# Altium PCB Controller.PcbDoc (part 1 of 2)
Units mm, origin at the board's own origin, x right, y up, seen from the top; angles counter-clockwise.
Board outline 100 x 95 mm, 2 copper layers (Top Layer, Bottom Layer); 164 components, 143 nets, 702 pads, 925 vias.
Unrouted connection lines stored in the file: 248.
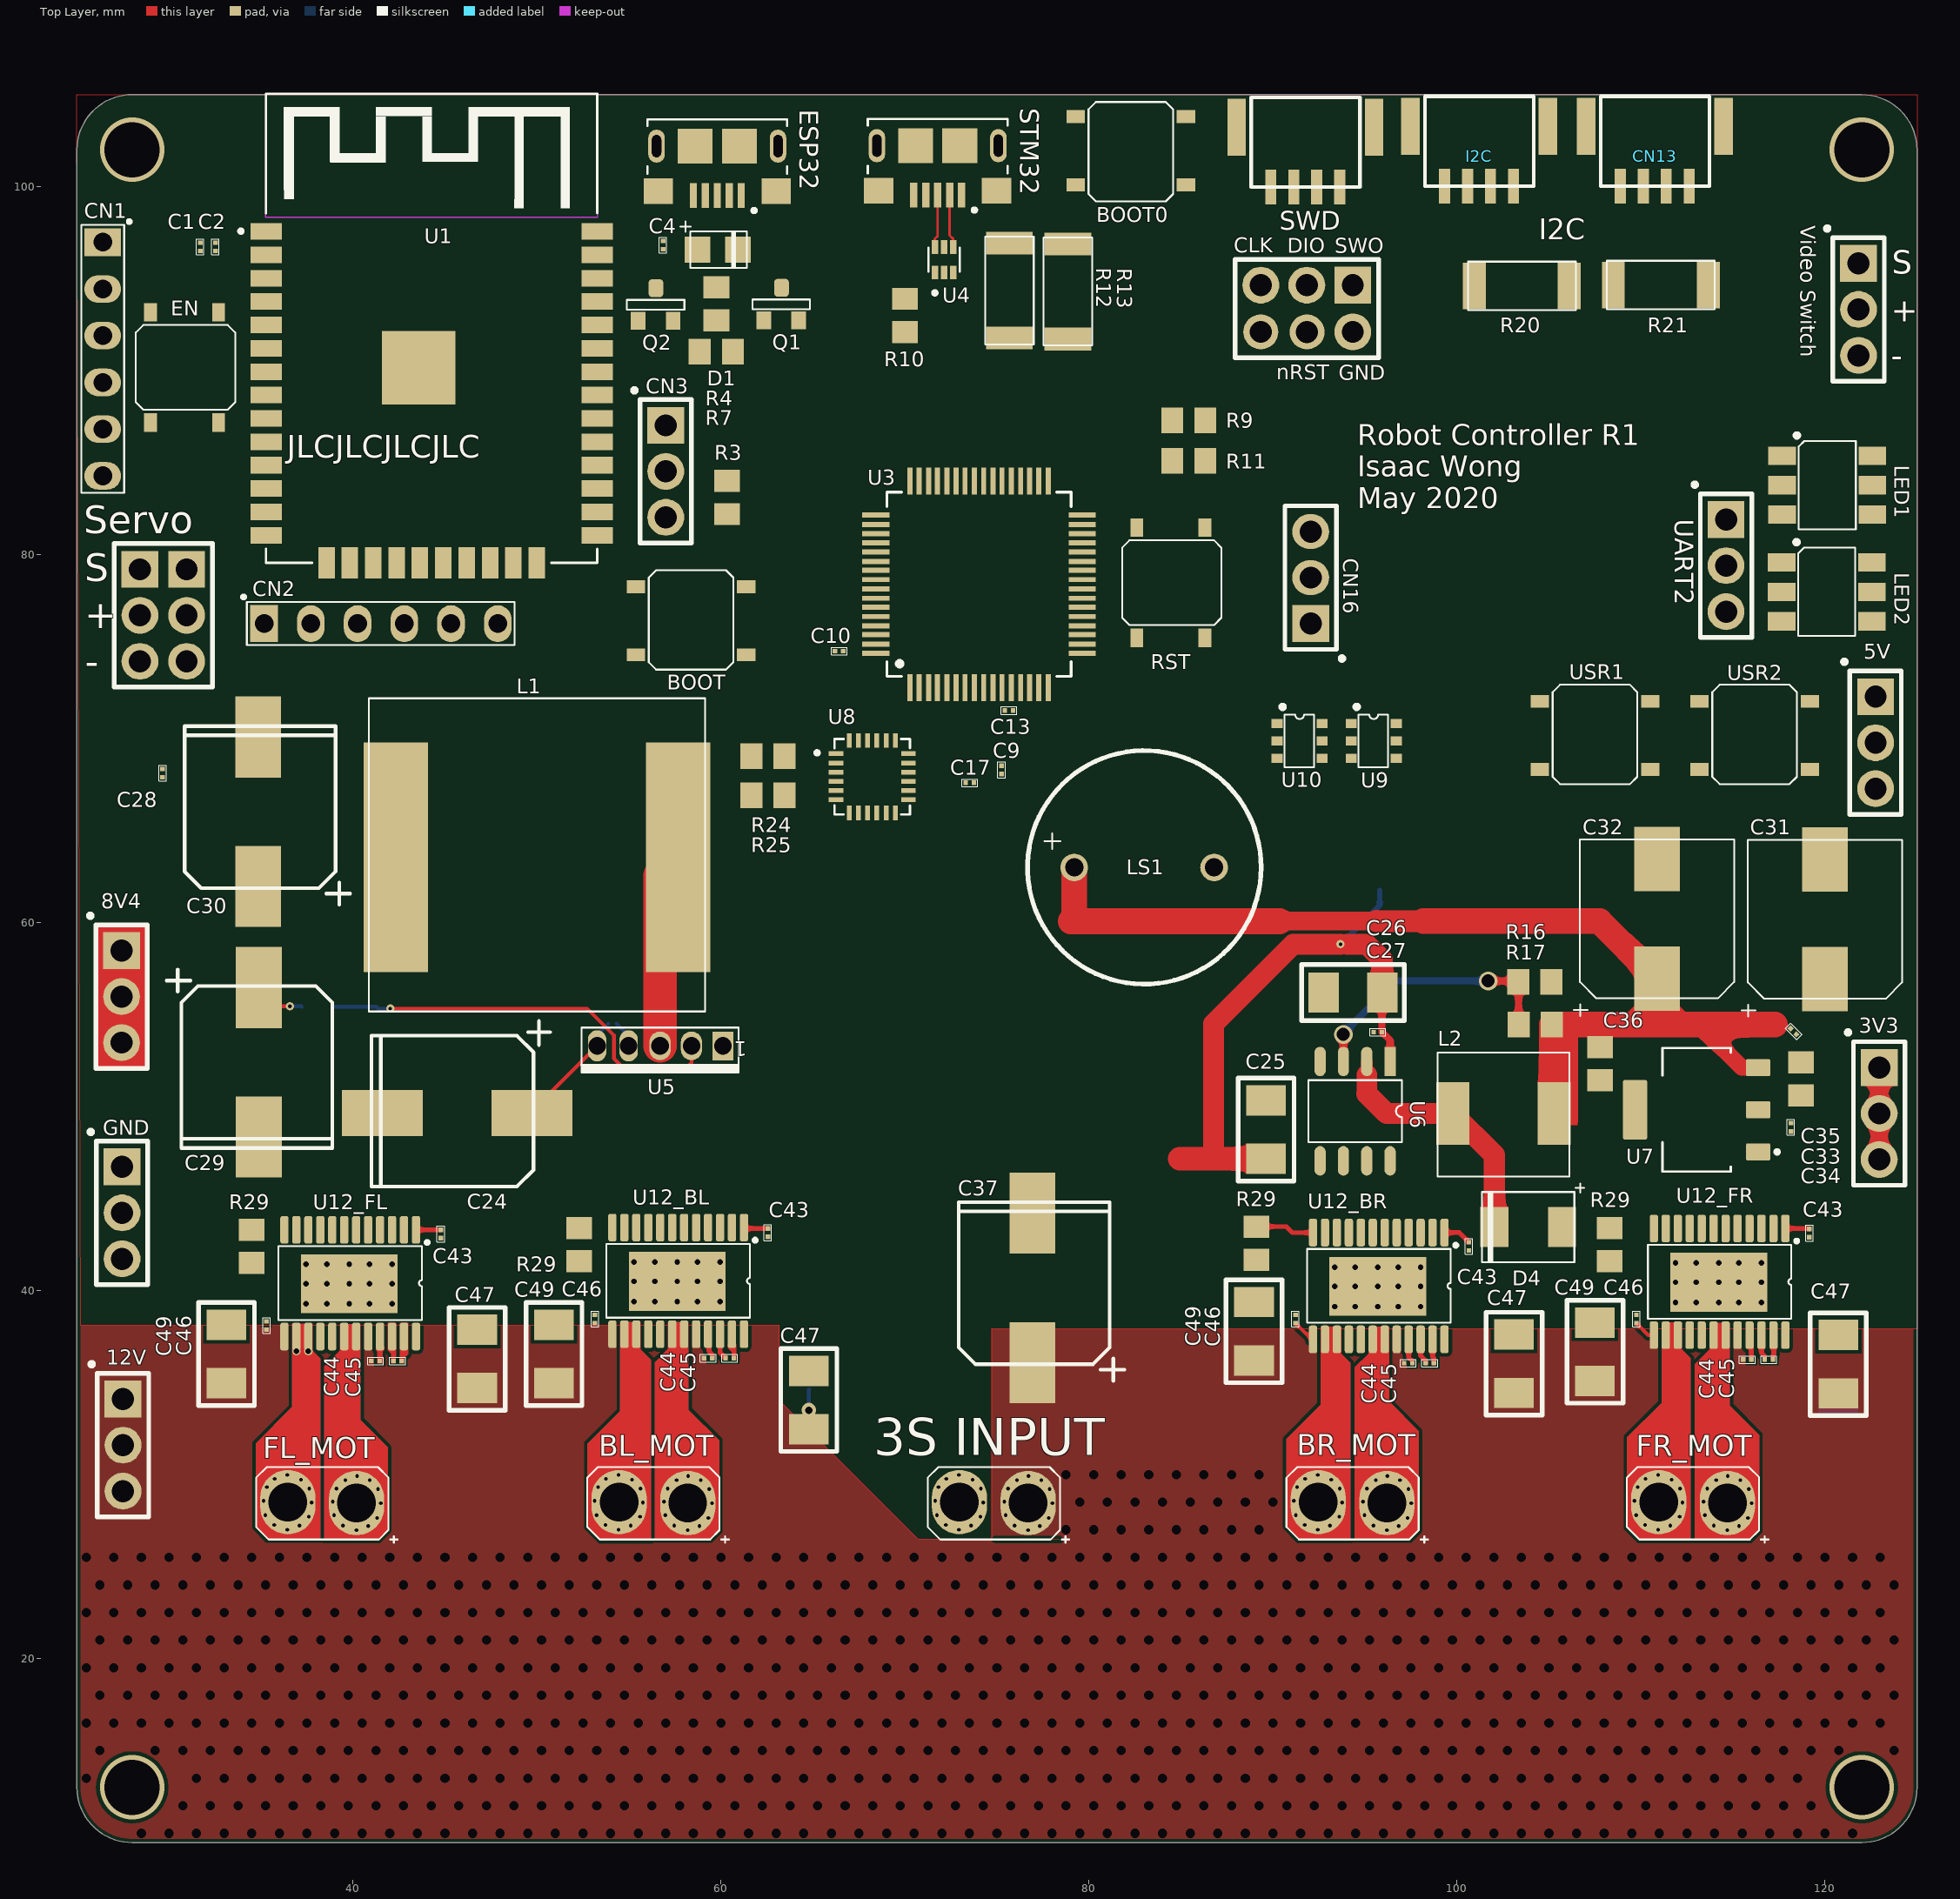
[diagram p0: Top Layer view]
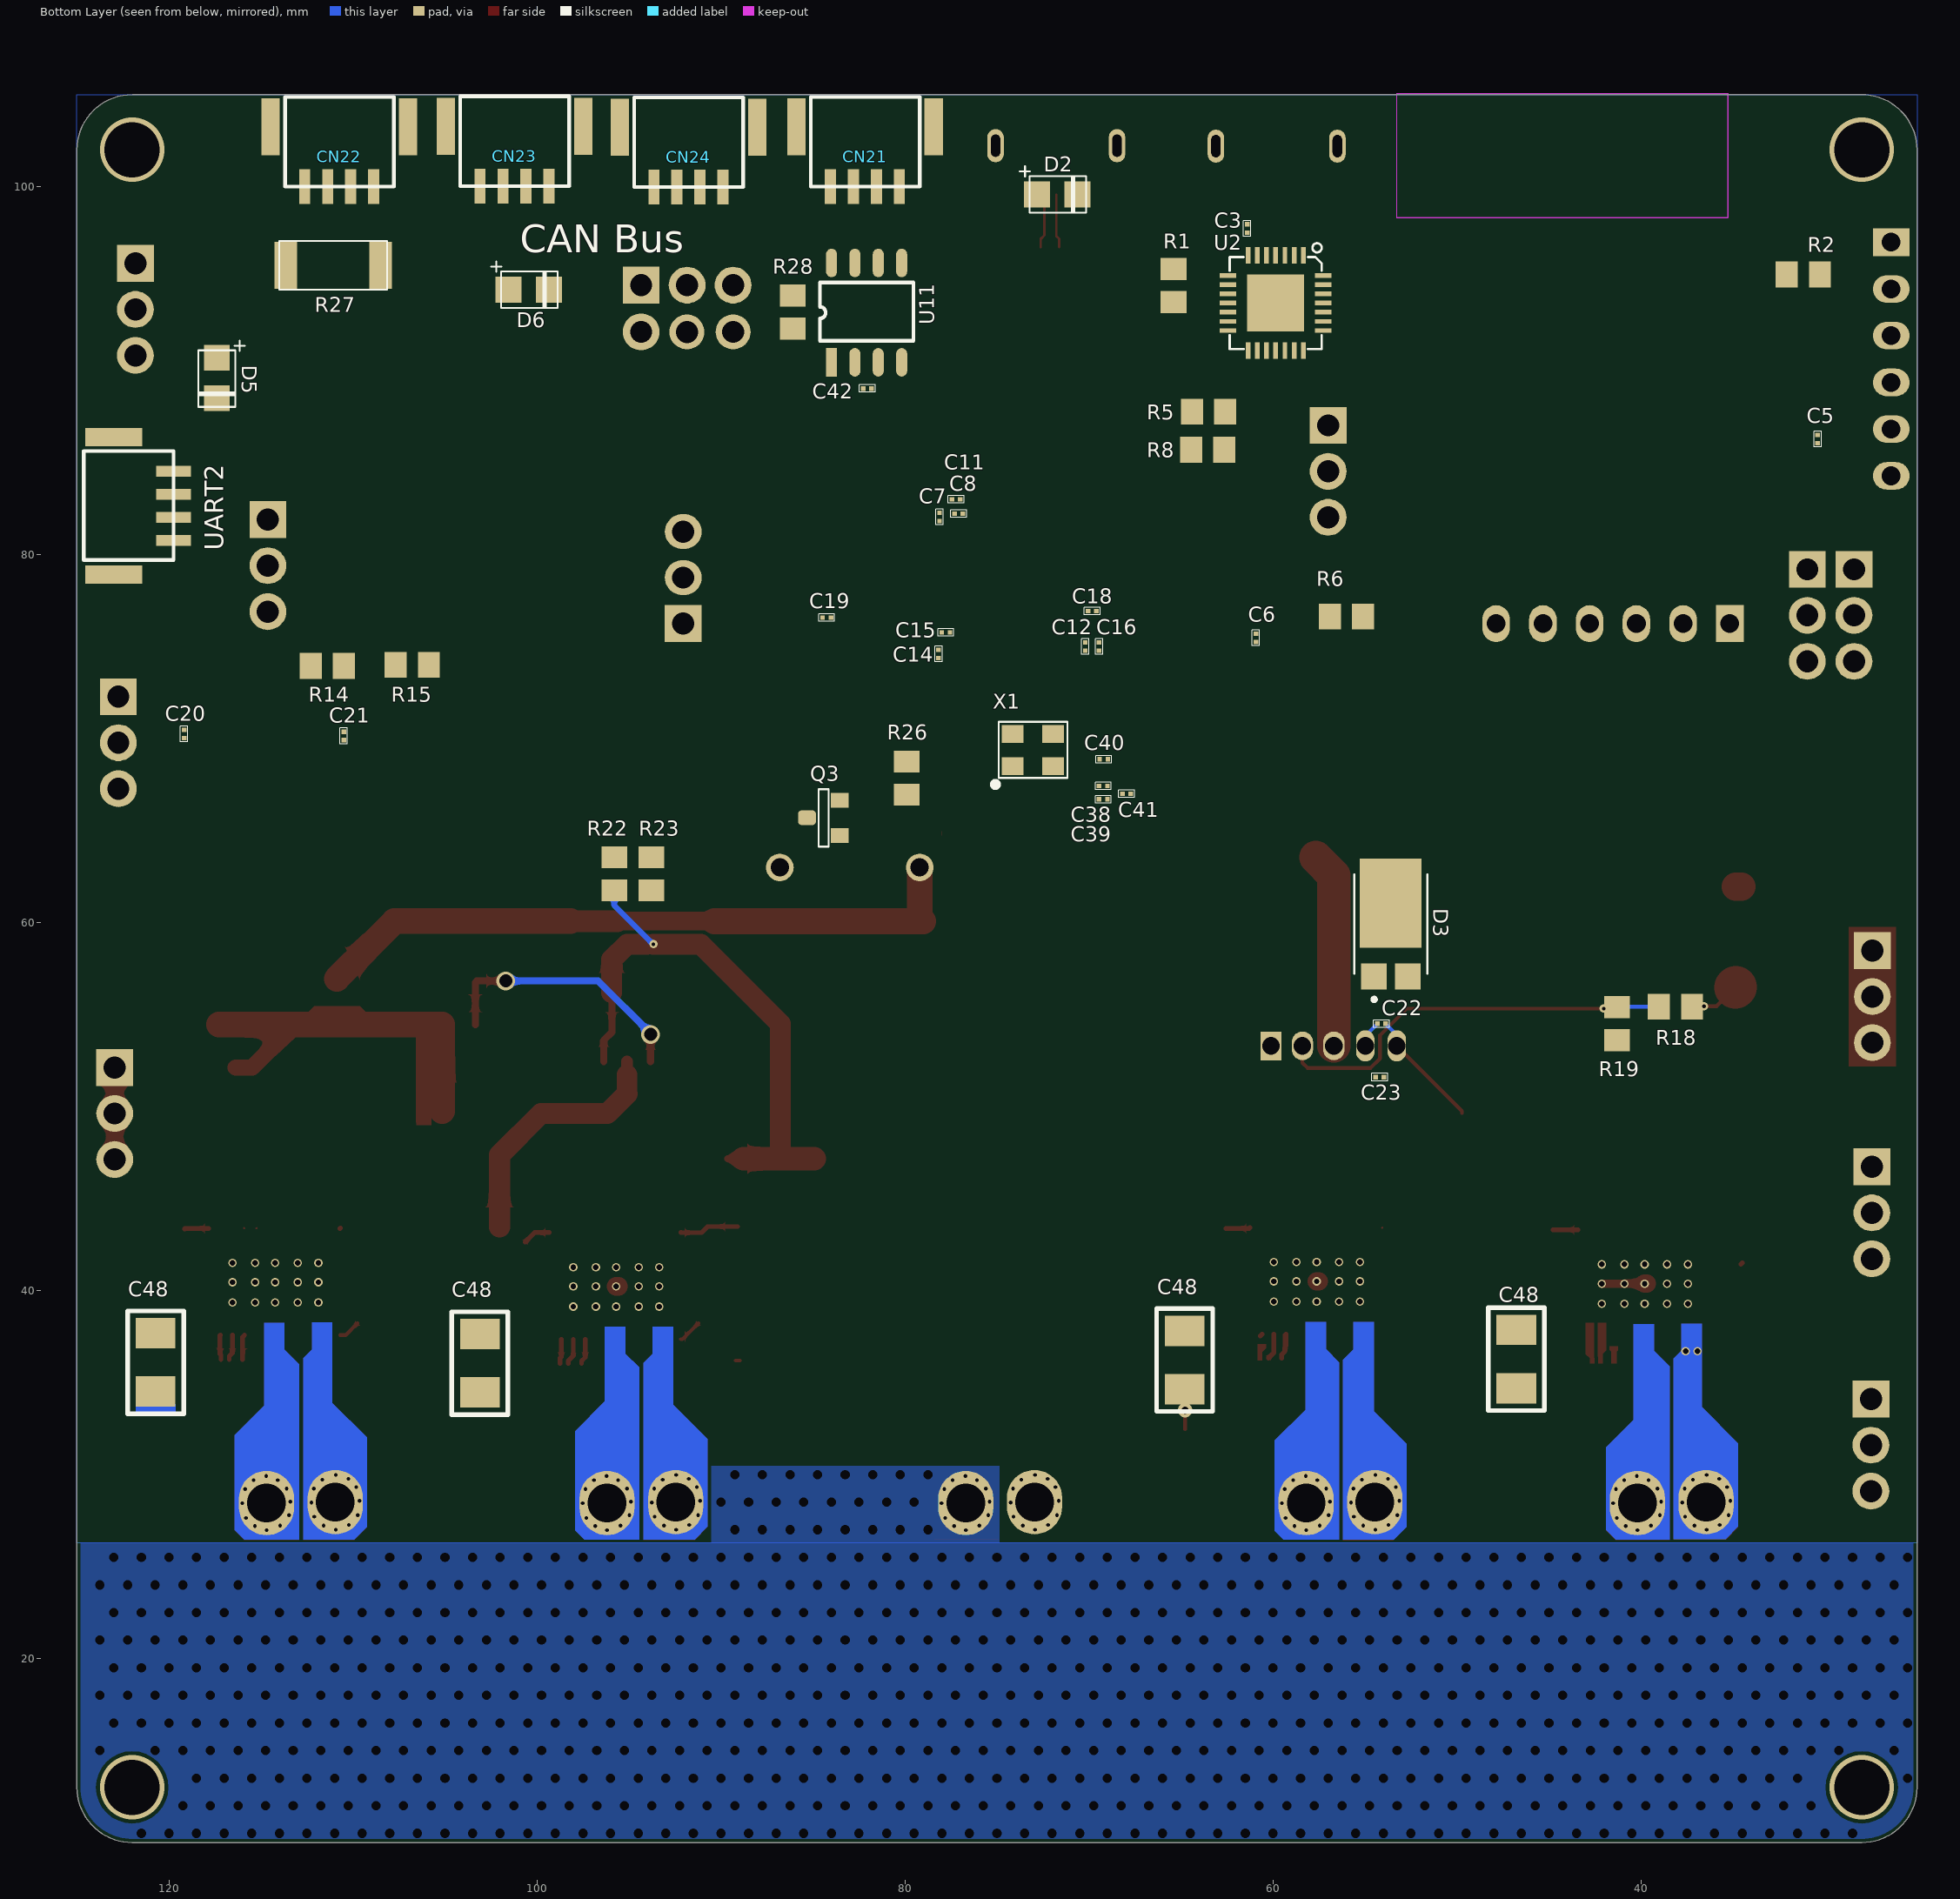
[diagram p1: Bottom Layer view, seen from below]

## Layer stack, top to bottom
Top Solder: solder mask 0.0102, Solder Resist, Dk 3.5
Top Layer: signal copper 0.0356
Dielectric 1: dielectric 0.32, FR-4, Dk 4.8
Bottom Layer: signal copper 0.0356
Bottom Solder: solder mask 0.0102, Solder Resist, Dk 3.5

## Board outline
25,13 ccw(c28,13) 28,10 122,10 ccw(c122,13) 125,13 125,102 ccw(c122,102) 122,105 28,105 ccw(c28,102) 25,102

## Design rules (kind name [scope] priority, off if disabled: settings)
BoardOutlineClearance [All] p1: gap=0.2 ignorepadtopadclearanceinfootprint=FALSE except(0.4: Arc-SplitBarrior Arc-SplitContinuation Track-SplitBarrior Track-SplitContinuation SMDPad-SplitBarrior SMDPad-SplitContinuation THPad-SplitBarrior THPad-SplitContinuation Via-SplitBarrior Via-SplitContinuation Fill-SplitBarrior Fill-SplitContinuation Poly-SplitBarrior Poly-SplitContinuation Region-SplitBarrior Region-SplitContinuation Text-SplitBarrior Text-SplitContinuation)
Clearance "Clearance Bottom Layer" [OnLayer('Bottom Layer')] p1: gap=0.2 ignorepadtopadclearanceinfootprint=TRUE except(0.1: Arc-Arc Arc-Track Arc-SMDPad Track-Track Track-SMDPad SMDPad-SMDPad; 0.127: Arc-Via Track-Via SMDPad-Via THPad-Via Via-Via; 0.254: Arc-Text Track-Text SMDPad-Text THPad-Text Via-Text Text-Text)
Clearance "Clearance Top Layer" [OnLayer('Top Layer')] p2: gap=0.2 ignorepadtopadclearanceinfootprint=TRUE except(0.1: Arc-Arc Arc-Track Arc-SMDPad Track-Track Track-SMDPad SMDPad-SMDPad; 0.127: Arc-Via Track-Via SMDPad-Via THPad-Via Via-Via; 0.203: Text-Hole; 0.254: Arc-Text Track-Text SMDPad-Text THPad-Text Via-Text Fill-Text Poly-Text Region-Text Text-Text)
Clearance [All] p3: gap=0.2 ignorepadtopadclearanceinfootprint=FALSE except(0.1: Arc-Arc Arc-Track Arc-SMDPad Track-Track Track-SMDPad SMDPad-SMDPad; 0.127: Arc-Via Track-Via SMDPad-Via THPad-Via Via-Via; 0.254: Arc-Text Track-Text SMDPad-Text THPad-Text Via-Text Fill-Text Poly-Text Region-Text Text-Text)
DiffPairsRouting [All] p1: maxlimit=0.254 minlimit=0.127 mostfreqgap=0.254 toplayer_minwidth=0.127 toplayer_maxwidth=0.381 toplayer_prefwidth=0.2 bottomlayer_minwidth=0.127 bottomlayer_maxwidth=0.381 bottomlayer_prefwidth=0.2 maxuncoupledlength=12.7
HoleSize [All] p1: absolutevalues=TRUE maxlimit=6.3 minlimit=0.2 maxpercent=80.000 minpercent=20.000
MatchedLengths MatchLengths_xSignals_U3_U4 [InxSignalClass('xSignals_U3_U4_MatchLengthsClass')] p1: tolerance=2.54 checknetsindiffpair=FALSE checkdiffpairvsdiffpair=TRUE checkxsignals=TRUE checkothers=TRUE
MatchedLengths [InDifferentialPair('USB')] p2: tolerance=0.2 checknetsindiffpair=TRUE checkdiffpairvsdiffpair=FALSE checkxsignals=FALSE checkothers=FALSE
MinimumAnnularRing [All] p1: minimumring=0.076
MinimumSolderMaskSliver [All] p1: minsoldermaskwidth=0.1
PlaneConnect [All] p1: planeconnectstyle=Direct reliefexpansion=0.508 reliefentries=4 reliefconductorwidth=0.254 reliefairgap=0.254
PolygonConnect PolygonConnect_1 [All] p1: connectstyle=Direct reliefconductorwidth=0.508 reliefentries=4 polygonreliefangle="90 Angle" airgapwidth=0.254
RoutingCorners [All] p1: cornerstyle=Round minsetback=2.54 maxsetback=2.54
RoutingVias [All] p1: holewidth=0.5 width=1 viastyle="Through Hole" minholewidth=0.2 minwidth=0.45 maxholewidth=1 maxwidth=2
SilkToSilkClearance [All] p1: silktosilkclearance=0.1
SilkToSolderMaskClearance [IsPad] p1: minsilkscreentomaskgap=0.1 clearancetoexposedcopper=TRUE
SolderMaskExpansion [All] p1: expansion=0.102
UnRoutedNet [All] p1: checkbadconnections=TRUE
Width [All] p1: maxlimit=2.54 minlimit=0.203 preferedwidth=0.203
22 further rules are at their usual default settings.

## Classes and differential pairs
channel class DRV8843: BL BR FL FR
component class U_Power: "3S INPUT" 3V3 5V 8V4 12V C22 C23 C24 C25 C26 C27 C28 C29 C30 C31 C32 C33 C34 C35 C36 C37 D3 D4 GND L1 L2 R16 R17 R18 R19 U5 U6 U7
component class U_MCU: BOOT BOOT0 C1 C2 C3 C4 C5 C6 C7 C8 C9 C10 C11 C12 C13 C14 C15 C16 C17 C18 C19 C20 C21 CN1 CN2 CN3 D2 ESP32 Q1 Q2 R1 R2 R3 R4 R5 R6 R7 R8 R9 R10 R11 R12 R13 R14 R15 RST STM32 SWD U1 U2 U3 U4 USR1 USR2 X1
component class U_LED: LED1 LED2 U9
component class U_IMU: C38 C39 C40 C41 U8
component class U_Drive: BL_MOT BR_MOT FL_MOT FR_MOT
component class U_CAN: C42 CN21 CN22 CN23 CN24 D6 R27 R28 U11
component class FR: C43 C44 C45 C46 C48 C49 R29 U12_FR
component class FL: C44 C45 C46 C48 R29 U12_FL
component class Controller: CN13 CN16 D5 I2C LS1 Q3 R20 R21 R22 R23 R24 R25 R26 UART2 "Video SWITCH"
component class BR: C43 C44 C45 C46 C48 C49 R29 U12_BR
component class BL: C43 C44 C45 C46 C48 C49 R29 U12_BL
differential pair USB: +USB_P -USB_N
differential pair NO_ESD: +NO_ESD_P -NO_ESD_N
differential pair ESP_USB: +ESP_USB_P -ESP_USB_N

## Components (designator, comment, footprint, x,y, rotation, side; value= is the part's Value field where it differs from the comment)
"3S INPUT" "Power In" Power_Leads 75.5,28.5 r180 top locked (schematic designator CN7)
3V3 "3P-2.5mm" 2.5mm-3P#1 122.95,52.125 r0 top (schematic designator CN11)
5V "3P-2.5mm" 2.5mm-3P#1 122.75,72.275 r0 top (schematic designator CN10)
8V4 "3P-2.5mm" 2.5mm-3P#1 27.425,58.475 r0 top (schematic designator CN9)
12V "3P-2.5mm" 2.5mm-3P#1 27.5,34.1 r0 top (schematic designator CN12)
BL_MOT "BL_MOT" Power_Leads 57,28.5 r180 top locked (schematic designator CN27)
BOOT "SPST Switch" 4.8x4.8-SMD-SWITCH 55.375,78.25 r0 top (schematic designator SW2)
BOOT0 "SPST Switch" 4.8x4.8-SMD-SWITCH 85.275,100.1 r180 top (schematic designator SW3)
BR_MOT "BR_MOT" Power_Leads 95,28.5 r180 top locked (schematic designator CN28)
C1 "ESP32_P1" 0402 31.7,96.725 r270 top value=1uF
C2 "ESP32_P1" 0402 32.525,96.725 r270 top value=100nF
C3 "P6" 0402 61.4,97.725 r270 bottom value=100nF
C4 "P7" 0402 56.85,96.825 r270 top value=100nF
C5 "Cap" 0402 30.4,86.275 r270 bottom value=100nF
C6 "Cap" 0402 60.925,75.475 r90 bottom value=100nF
C7 "Pin 32" 0402 78.125,82.05 r90 bottom value=100nF
C8 "Pin 33" 0402 77.225,83 r0 bottom value=100nF
C9 "XO" 0402 75.25,68.3 r90 top value=100nF
C10 "" 0402 66.425,74.75 r0 top value=1uF
C11 "" 0402 77.075,82.225 r0 bottom value=1uF
C12 "Pin 1" 0402 70.2,75 r270 bottom value=100nF
C13 "Pin 13" 0402 75.65,71.525 r0 top value=100nF
C14 "Pin 17" 0402 78.175,74.6 r90 bottom value=100nF
C15 "Pin 19" 0402 77.775,75.775 r0 bottom value=100nF
C16 "Pin 64" 0402 69.45,75 r270 bottom value=100nF
C17 "XO" 0402 73.525,67.6 r0 top value=10nF
C18 "Cap" 0402 69.825,76.925 r0 bottom value=100nF
C19 "Cap" 0402 84.25,76.575 r0 bottom value=100nF
C20 "Cap" 0402 119.175,70.25 r90 bottom value=100nF
C21 "Cap" 0402 110.5,70.15 r90 bottom value=100nF
C22 "Cap" 0402 54.1,54.5 r180 bottom value=1uF
C23 "Cap" 0402 54.2,51.6 r180 bottom value=1uF
C24 "470uF" 10x12mm-Electrolytic 45.41,49.65 r0 top
C25 "Cap" 1206 89.625,48.75 r270 top value=47uF
C26 "Cap" 1206 94.35,56.2 r0 top value=47uF
C27 "Cap" 0402 95.7,54.05 r0 top value=100nF
C28 "Cap" 0402 29.65,68.125 r270 top value=1uF
C29 "470uF" 10x12mm-Electrolytic 34.875,52.15 r90 top
C30 "470uF" 10x12mm-Electrolytic 34.85,66.275 r270 top
C31 "100uF" "8x10.2 Cap" 120,60.175 r90 top
C32 "100uF" "8x10.2 Cap" 110.875,60.2 r90 top
C33 "Cap" "0805 - duplicate" 118.7,51.5 r270 top value=4.7uF
C34 "Cap" 0402 118.15,48.875 r90 top value=100nF
C35 "Cap" 0402 118.291,54.084 r135 top value=100nF
C36 "Cap" "0805 - duplicate" 107.775,52.325 r90 top value=4.7uF
C37 "470uF" 10x12mm-Electrolytic 76.925,40.4 r270 top
C38 "Cap" 0402 69.225,67.425 r0 bottom value=1uF
C39 "Cap" 0402 69.225,66.7 r0 bottom value=100nF
C40 "Cap" 0402 69.2,68.875 r180 bottom value=2.2nF
C41 "Cap" 0402 67.95,67 r0 bottom value=100nF
C42 "Cap" 0402 82.05,89.025 r180 bottom value=100nF
C43 "Cap" 0402 119.15,43.125 r270 top value=1uF
C43 "Cap" 0402 44.775,43.075 r270 top value=1uF
C43 "Cap" 0402 100.65,42.4 r270 top value=1uF
C43 "Cap" 0402 62.55,43.15 r270 top value=1uF
C44 "Cap" 0402 115.775,36.25 r180 top value=1uF
C44 "Cap" 0402 41.225,36.175 r180 top value=1uF
C44 "Cap" 0402 97.35,36.05 r180 top locked value=1uF
C44 "Cap" 0402 59.3,36.325 r180 top value=1uF
C45 "Cap" 0402 116.95,36.25 r180 top value=47nF
C45 "Cap" 0402 42.425,36.175 r180 top value=47nF
C45 "Cap" 0402 98.525,36.05 r180 top locked value=47nF
C45 "Cap" 0402 60.475,36.325 r180 top value=47nF
C46 "Cap" 0402 109.75,38.45 r270 top value=100nF
C46 "Cap" 0402 35.3,38.1 r270 top value=100nF
C46 "Cap" 0402 91.225,38.45 r270 top value=100nF
C46 "Cap" 0402 53.15,38.45 r270 top value=100nF
C47 "Cap" 1206 46.75,36.287 r270 top locked value=47uF
C47 "Cap" 1206 120.725,36 r270 top value=47uF
C47 "Cap" 1206 103.1,36.025 r270 top locked value=47uF
C47 "Cap" 1206 64.775,34.05 r270 top value=47uF
C48 "Cap" 1206 120.725,36.1 r270 bottom value=47uF
C48 "Cap" 1206 46.775,36.275 r270 bottom value=47uF
C48 "Cap" 1206 103.1,36.05 r270 bottom value=47uF
C48 "Cap" 1206 64.8,36.225 r270 bottom locked value=47uF
C49 "Cap" 1206 107.5,36.675 r270 top value=47uF
C49 "Cap" 1206 33.125,36.55 r270 top value=47uF
C49 "Cap" 1206 88.975,37.788 r270 top value=47uF
C49 "Cap" 1206 50.925,36.55 r270 top value=47uF
CN1 "6P-2.5mm" 6-Pin-Header 26.4,96.98 r0 top
CN2 "6P-2.5mm" 6-Pin-Header 35.17,76.25 r90 top
CN3 "3P-2.5mm" 2.5mm-3P#1 57,87.025 r0 top
CN13 "JST_GH-4P" JST_GH-4P 108.875,100.025 r90 top
CN16 "3P-2.5mm" 2.5mm-3P#2 92.05,76.25 r180 top
CN21 "JST_GH-4P" JST_GH-4P 84.05,100 r90 bottom
CN22 "JST_GH-4P" JST_GH-4P 112.625,100 r90 bottom
CN23 "JST_GH-4P" JST_GH-4P 103.1,100.025 r90 bottom
CN24 "JST_GH-4P" JST_GH-4P 93.646,99.974 r90 bottom
D1 "SS12F" SMAF_DIODE 59.825,96.575 r0 top
D2 "SS12F" SMAF_DIODE 71.725,99.575 r180 bottom
D3 "Diode" PowerDi5 53.6,59.925 r180 bottom
D4 "SS24" DO-214AA 103.875,43.45 r0 top
D5 "SS12F" SMAF_DIODE 117.4,89.6 r270 bottom
D6 "SS12F" SMAF_DIODE 100.45,94.4 r180 bottom
EN "SPST Switch" 4.8x4.8-SMD-SWITCH 32.7,93.175 r270 top (schematic designator SW1)
ESP32 "10118193-0001LF" FCI_10118193-0001LF 59.8,102.2 r180 top locked (schematic designator J1)
FL_MOT "FL_MOT" Power_Leads 39,28.5 r180 top locked (schematic designator CN25)
FR_MOT "FR_MOT" Power_Leads 113.5,28.5 r180 top locked (schematic designator CN26)
GND "3P-2.5mm" 2.5mm-3P#1 27.45,46.725 r0 top (schematic designator CN8)
I2C "JST_GH-4P" JST_GH-4P 99.325,100.025 r90 top (schematic designator CN17)
L1 "47uH 8A" 18x16-9-Inductor 50,63.55 r180 top
L2 "22uH" 71x66-Inductor 102.525,49.625 r0 top
LED1 "APA102C" 5x5_WS2812 117.675,85.375 r0 top
LED2 "APA102C" 5x5_WS2812 117.65,79.575 r0 top
LS1 "Buzzer" 12-dia-buzzer 79.2,63 r0 top
Q1 "S8050" SOT23-FET 62.325,92.725 r90 top
Q2 "S8050" SOT23-FET 55.5,92.7 r90 top
Q3 "S8050" SOT23-FET 83.547,64.735 r0 bottom
R1 "10k" "0805 - duplicate" 65.4,94.625 r270 bottom
R2 "10k" "0805 - duplicate" 31.175,95.225 r180 bottom
R3 "0R" "0805 - duplicate" 60.325,83.1 r270 top
R4 "10k" "0805 - duplicate" 59.75,93.625 r270 top
R5 "1k" "0805 - duplicate" 63.5,87.775 r0 bottom
R6 "10k" "0805 - duplicate" 56,76.625 r180 bottom
R7 "10k" "0805 - duplicate" 59.75,91.025 r180 top
R8 "1k" "0805 - duplicate" 63.55,85.7 r0 bottom
R9 "10k" "0805 - duplicate" 85.425,87.3 r0 top
R10 "1.5k" "0805 - duplicate" 70,93 r90 top
R11 "10k" "0805 - duplicate" 85.425,85.1 r0 top
R12 "10k" 2010_SMD_Resistor 75.675,94.35 r90 top
R13 "15k" 2010_SMD_Resistor 78.85,94.3 r270 top
R14 "10k" "0805 - duplicate" 111.4,73.95 r0 bottom
R15 "10k" "0805 - duplicate" 106.775,74 r180 bottom
R16 "3.3k" "0805 - duplicate" 104.225,56.775 r0 top
R17 "10k" "0805 - duplicate" 104.25,54.45 r0 top
R18 "10k" "0805 - duplicate" 38.125,55.425 r180 bottom
R19 "1.74k" "0805 - duplicate" 41.3,54.5 r90 bottom
R20 "2k" 2010_SMD_Resistor 103.525,94.6 r0 top
R21 "2k" 2010_SMD_Resistor 111.079,94.65 r180 top
R22 "20k" "0805 - duplicate" 95.8,62.65 r270 bottom
R23 "4k" "0805 - duplicate" 93.775,62.65 r270 bottom
R24 "2k" "0805 - duplicate" 62.55,69.05 r180 top
R25 "2k" "0805 - duplicate" 62.55,66.925 r180 top
R26 "1k" "0805 - duplicate" 79.9,67.85 r90 bottom
R27 "120" 2010_SMD_Resistor 111.075,95.725 r180 bottom
R28 "100" "0805 - duplicate" 86.1,93.175 r90 bottom
R29 "150R" "0805 - duplicate" 108.3,42.5 r90 top
R29 "150R" "0805 - duplicate" 34.5,42.4 r90 top
R29 "150R" "0805 - duplicate" 89.1,42.575 r90 top
R29 "150R" "0805 - duplicate" 52.3,42.5 r90 top
RST "SPST Switch" 4.8x4.8-SMD-SWITCH 86.3,81.475 r270 top locked (schematic designator SW4)
STM32 "10118193-0001LF" FCI_10118193-0001LF 71.775,102.225 r180 top locked (schematic designator J2)
SWD "JST_GH-4P" JST_GH-4P 89.879,99.974 r90 top (schematic designator CN4)
U1 "ESP-WROOM-32" ESP-WROOM-32 44.275,89.305 r0 top locked
U2 "CP2102-GMR" QFN28G_0.5-5X5MM 59.85,93.675 r270 bottom locked
U3 "STM32F373RCTx" LQFP64 74.026,78.387 r90 top
U4 "USBLC6-2P6" SOT50P160X60-6N 72.125,96.025 r90 top locked
U5 "XL4016" TO220-5L 60.11,53.3 r270 top
U6 "XL1509-ADJ" SOP8-MT3420 96.37,52.45 r270 top
U7 "AMS1117-3.3" SOT229P700X180-4N 113.025,49.825 r90 top locked
U8 "MPU-6050" QFN50P400X400X95-24N 68.225,67.925 r0 top locked
U9 "PI4ULS5V201" SOT23-PI4ULS5V201 94.25,70.825 r0 top
U10 "PI4ULS5V201" SOT23-PI4ULS5V201 90.225,70.825 r0 top
U11 "SN65HVD230" SOIC8-TI_CAN 83.99,90.45 r90 bottom locked
U12_BL "DRV8873S" HTSSOP24 61.25,43.425 r270 top locked (schematic designator U12)
U12_BR "DRV8873S" HTSSOP24 99.325,43.15 r270 top locked (schematic designator U12)
U12_FL "DRV8873S" HTSSOP24 43.425,43.3 r270 top locked (schematic designator U12)
U12_FR "DRV8873S" HTSSOP24 117.85,43.375 r270 top locked (schematic designator U12)
UART2 "3P-2.5mm" 2.5mm-3P#1 114.625,81.9 r0 top (schematic designator CN20)
UART2 "JST_GH-4P" JST_GH-4P 119.75,80.775 r0 bottom (schematic designator CN19)
USR1 "USR_BTN1" 4.8x4.8-SMD-SWITCH 104.5,72.025 r0 top (schematic designator SW6)
USR2 "USR_BTN2" 4.8x4.8-SMD-SWITCH 113.175,72.025 r0 top (schematic designator SW5)
"Video Switch" "3P-2.5mm" 2.5mm-3P#1 121.825,95.825 r0 top locked (schematic designator CN18)
X1 "8MHz 3225 SMD Oscillator" "3.2x2.5 SMD" 74.15,70.25 r180 bottom

## Footprints (in the part's own frame and the unit in brackets; to place one, negate y for a bottom-side part, rotate by r counter-clockwise, add the part's x,y. Pads: shape width x height; smd on the part's side, far side on the other; paste and mask are expansions set on the pad)
2.5mm-3P#1 [mm]
  rect 2x2 hole 1.2: 1(0,0)
  round 2 hole 1.2: 2(0,-2.5) 3(0,-5)
  silkscreen extent -1.8,-6.4 1.4,2
2.5mm-3P#2 [mm]
  rect 2x2 hole 1.2: 1(0,0)
  oval 2x1.9 hole 1.2: 2(0,-2.5) 3(0,-5)
  silkscreen extent -1.8,-6.4 1.4,2
"3.2x2.5 SMD" [mm]
  rect 1.2x0.95 smd: 1(0,-1.75) 2(2.2,-1.75) 3(2.2,0) 4(0,0)
  silkscreen extent -1.11,-2.91 2.97,0.66
4.8x4.8-SMD-SWITCH [mm]
  rect 1x0.7 smd: 1(0,0) 2(6,0) 3(0,-3.7) 4(6,-3.7)
  silkscreen extent 0.7,-4.5 5.3,0.9
5x5_WS2812 [mm]
  rect 1.5x1 smd: 1(0,0) 2(0,-1.6) 3(0,-3.2) 4(4.9,-3.2) 5(4.9,-1.6) 6(4.9,0)
  silkscreen extent 0.7,-4 4,1.2
6-Pin-Header [mm]
  rect 2x1.5 hole 1.02: 1(0,0)
  oval 2x1.5 hole 1.02: 2(0,-2.54) 3(0,-5.08) 4(0,-7.62) 5(0,-10.16) 6(0,-12.7)
  silkscreen extent -1.17,-13.61 1.5,1.17
"8x10.2 Cap" [mm]
  rect 3.5x2.5 smd: 1(-3.25,0) 2(3.25,0)
  silkscreen extent -5.28,-4.19 4.32,4.52
10x12mm-Electrolytic [mm]
  rect 4.4x2.5 smd: 1(4.318,0) 2(-3.81,0)
  silkscreen extent -4.4,-4 5.3,5
12-dia-buzzer [mm]
  round 1.5 hole 1: A(0,0) K(7.6,0)
  silkscreen extent -2.54,-6.35 10.16,6.35
18x16-9-Inductor [mm]
  rect 3.5x12.5 smd: 1(-7.675,0) 2(7.675,0)
  silkscreen extent -9.14,-8.64 9.14,8.38
71x66-Inductor [mm]
  rect 1.8x3.4 smd: 1(-2.75,0) 2(2.75,0)
  silkscreen extent -3.58,-3.43 3.58,3.3
0402 [mm]
  rect 0.25x0.25 smd mask+0.05: 1(-0.225,0) 2(0.225,0)
  silkscreen extent -0.43,-0.2 0.43,0.2
"0805 - duplicate" [mm] "Chip Resistor, Body 2.0x1.2mm, IPC Medium Density"
  rect 1.2x1.4 smd: 1(-0.9,0) 2(0.9,0)
  body extent -1.07,-0.7 1.07,0.7, height 0.7
1206 [mil]
  rect 65x85 smd: 1(-62.5,0) 2(62.5,0)
  silkscreen extent -110,-60 110,60
2010_SMD_Resistor [mm]
  rect 1.245x2.54 smd: 1(-2.578,0) 2(2.579,0)
  silkscreen extent -2.93,-1.32 2.93,1.32
DO-214AA [mm]
  rect 1.52x2.18 smd: A(1.84,0) K(-1.839,0)
  silkscreen extent -2.51,-1.91 3.05,2.36
ESP-WROOM-32 [mm]
  rect 1.7x0.9 smd: 1(-9,8.255) 2(-9,6.985) 3(-9,5.715) 4(-9,4.445) 5(-9,3.175) 6(-9,1.905) 7(-9,0.635) 8(-9,-0.635) 9(-9,-1.905) 10(-9,-3.175) 11(-9,-4.445) 12(-9,-5.715) 13(-9,-6.985) 14(-9,-8.255) 25(9,-8.255) 26(9,-6.985) 27(9,-5.715) 28(9,-4.445) 29(9,-3.175) 30(9,-1.905) 31(9,-0.635) 32(9,0.635) 33(9,1.905) 34(9,3.175) 35(9,4.445) 36(9,5.715) 37(9,6.985) 38(9,8.255)
  rect 4x4 smd: 1(-0.7,0.845)
  rect 0.9x1.7 smd: 15(-5.715,-9.755) 16(-4.445,-9.755) 17(-3.175,-9.755) 18(-1.905,-9.755) 19(-0.635,-9.755) 20(0.635,-9.755) 21(1.905,-9.755) 22(3.175,-9.755) 23(4.445,-9.755) 24(5.715,-9.755)
  Keep-Out Layer region: -9.024,15.75 9,15.75 9,9.024 -9.024,9.024
  Keep-Out Layer region: -9.012,15.75 9,15.75 9,9.012 -9.012,9.012
  Keep-Out Layer region: -9.026,15.75 9,15.75 9,9.026 -9.026,9.026
  Keep-Out Layer region: -9.024,15.75 9,15.75 9,9.024 -9.024,9.024
  Keep-Out Layer region: -9.012,15.75 9,15.75 9,9.012 -9.012,9.012
  Keep-Out Layer region: -9.026,15.75 9,15.75 9,9.026 -9.026,9.026
  Keep-Out Layer region: -9.024,15.75 9,15.75 9,9.024 -9.024,9.024
  Keep-Out Layer region: -9.012,15.75 9,15.75 9,9.012 -9.012,9.012
  Keep-Out Layer region: -9.026,15.75 9,15.75 9,9.026 -9.026,9.026
  silkscreen extent -10.46,-9.75 9,15.75
FCI_10118193-0001LF [mm]
  rect 0.4x1.35 smd: 1(-1.3,2.675) 2(-0.65,2.675) 3(0,2.675) 4(0.65,2.675) 5(1.3,2.675)
  oval 0.9x1.8 hole 0.5 slot 1.2 at 90 deg: S(-3.3,0) S(3.3,0)
  rect 1.6x1.4 smd: S(-3.2,2.45) S(3.2,2.45)
  rect 1.9x1.9 smd: S(-1.2,0) S(1.2,0)
  silkscreen extent -3.8,-1.45 3.8,3.6
HTSSOP24 [mm]
  rrect50% 1.5x0.45 smd mask+0.05: 1(0,0) 2(0,-0.65) 3(0,-1.3) 4(0,-1.95) 5(0,-2.6) 6(0,-3.25) 7(0,-3.9) 8(0,-4.55) 9(0,-5.2) 10(0,-5.85) 11(0,-6.5) 12(0,-7.15) 13(5.8,-7.15) 14(5.8,-6.5) 15(5.8,-5.85) 16(5.8,-5.2) 17(5.8,-4.55) 18(5.8,-3.9) 19(5.8,-3.25) 20(5.8,-2.6) 21(5.8,-1.95) 22(5.8,-1.3) 23(5.8,-0.65) 24(5.8,0)
  rect 3.2x5.26 smd: THERM(2.925,-3.625)
  Top Layer region: 1.325,-6.2
  silkscreen extent 0.63,-7.48 4.9,0.67
JST_GH-4P [mm]
  rect 1.9x0.6 smd: 1(0,-3.75) 2(0,-2.5) 3(0,-1.25) 4(0,0)
  rect 3.1x1 smd: 5(3.251,-5.613) 5(3.251,1.854)
  silkscreen extent 0,-4.85 4.88,1.07
LQFP64 [mil]
  rect 58x11 smd: 1(-221,148) 2(-221,128) 3(-221,108) 4(-221,89) 5(-221,69) 6(-221,49) 7(-221,30) 8(-221,10) 9(-221,-10) 10(-221,-30) 11(-221,-49) 12(-221,-69) 13(-221,-89) 14(-221,-108) 15(-221,-128) 16(-221,-148) 33(221,-148) 34(221,-128) 35(221,-108) 36(221,-89) 37(221,-69) 38(221,-49) 39(221,-30) 40(221,-10) 41(221,10) 42(221,30) 43(221,49) 44(221,69) 45(221,89) 46(221,108) 47(221,128) 48(221,148)
  rect 11x58 smd: 17(-148,-221) 18(-128,-221) 19(-108,-221) 20(-89,-221) 21(-69,-221) 22(-49,-221) 23(-30,-221) 24(-10,-221) 25(10,-221) 26(30,-221) 27(49,-221) 28(69,-221) 29(89,-221) 30(108,-221) 31(128,-221) 32(148,-221) 49(148,221) 50(128,221) 51(108,221) 52(89,221) 53(69,221) 54(49,221) 55(30,221) 56(10,221) 57(-10,221) 58(-30,221) 59(-49,221) 60(-69,221) 61(-89,221) 62(-108,221) 63(-128,221) 64(-148,221)
  silkscreen extent -197,-197 197,197
Power_Leads [mm]
  oval 3x3.5 hole 2.1: A(-1.194,0.051) K(2.54,0)
  silkscreen extent -3.43,-1.91 4.27,2.21
PowerDi5 [mm]
  rect 1.39x1.4 smd: 1(-0.92,-2.856) 2(0.92,-2.856)
  rect 3.36x4.86 smd: 3(0,1.126)
  silkscreen extent -1.99,-4.2 1.99,2.69
QFN28G_0.5-5X5MM [mm]
  rect 0.9x0.254 smd: 1(-2.59,1.5) 2(-2.59,1) 3(-2.59,0.5) 4(-2.59,0) 5(-2.59,-0.5) 6(-2.59,-1) 7(-2.59,-1.5) 15(2.59,-1.5) 16(2.59,-1) 17(2.59,-0.5) 18(2.59,0) 19(2.59,0.5) 20(2.59,1) 21(2.59,1.5)
  rect 0.254x0.9 smd: 8(-1.5,-2.59) 9(-1,-2.59) 10(-0.5,-2.59) 11(0,-2.59) 12(0.5,-2.59) 13(1,-2.59) 14(1.5,-2.59) 22(1.5,2.59) 23(1,2.59) 24(0.5,2.59) 25(0,2.59) 26(-0.5,2.59) 27(-1,2.59) 28(-1.5,2.59)
  rect 3.1x3.1 smd paste-3: 29(0,0)
  silkscreen extent -3.25,-2.5 2.5,2.5
QFN50P400X400X95-24N [mm]
  rect 0.79x0.26 smd mask+0.089: 1(-1.97,1.25) 2(-1.97,0.75) 3(-1.97,0.25) 4(-1.97,-0.25) 5(-1.97,-0.75) 6(-1.97,-1.25) 13(1.97,-1.25) 14(1.97,-0.75) 15(1.97,-0.25) 16(1.97,0.25) 17(1.97,0.75) 18(1.97,1.25)
  rect 0.26x0.79 smd mask+0.089: 7(-1.25,-1.97) 8(-0.75,-1.97) 9(-0.25,-1.97) 10(0.25,-1.97) 11(0.75,-1.97) 12(1.25,-1.97) 19(1.25,1.97) 20(0.75,1.97) 21(0.25,1.97) 22(-0.25,1.97) 23(-0.75,1.97) 24(-1.25,1.97)
  silkscreen extent -3.1,-2.05 2.05,2.05
SMAF_DIODE [mm]
  rect 1.4x1.4 smd: A(-1.1,0) K(1.1,0)
  silkscreen extent -2.03,-1 1.57,1.52
SOIC8-TI_CAN [mm]
  rect 1.55x0.6 smd: 1(0,0)
  oval 1.55x0.6 smd: 2(0,-1.27) 3(0,-2.54) 4(0,-3.81) 5(5.4,-3.81) 6(5.4,-2.54) 7(5.4,-1.27) 8(5.4,0)
  silkscreen extent 1.17,-4.44 4.34,0.64
SOP8-MT3420 [mm]
  rect 1.6x0.61 smd: 1(0,0)
  oval 1.6x0.61 smd: 2(0,-1.27) 3(0,-2.54) 4(0,-3.81) 5(5.4,-3.81) 6(5.4,-2.54) 7(5.4,-1.27) 8(5.4,0)
  silkscreen extent 1.02,-4.44 4.39,0.64
SOT23-FET [mil]
  rect 38.27x31.57 smd: 1(0,0) 2(0,-74.8)
  rrect50% 38.27x31.57 smd: 3(70,-38)
  silkscreen extent 24,-99 45,24
SOT23-PI4ULS5V201 [mm]
  rect 0.6x0.5 smd: 1(0,0) 2(0,-0.95) 3(0,-1.9) 4(2.45,-1.9) 5(2.45,-0.95) 6(2.45,0)
  silkscreen extent 0.2,-2.38 2,1
SOT50P160X60-6N [mm]
  rrect8% 0.75x0.35 smd: 1(-0.69,0.5) 2(-0.69,0) 3(-0.69,-0.5) 4(0.69,-0.5) 5(0.69,0) 6(0.69,0.5)
  silkscreen extent -1.9,-0.85 0.65,0.85
SOT229P700X180-4N [mm]
  rrect15% 0.93x1.31 smd: 1(-2.29,-3.345) 2(0,-3.345) 3(2.29,-3.345)
  rrect15% 3.24x1.31 smd: 4(0,3.345)
  silkscreen extent -3.36,-4.47 3.36,1.86
TO220-5L [mm]
  rect 1.56x1.15 hole 0.95: 1(0,0)
  oval 1.56x1.15 hole 0.95: 2(0,-1.71) 3(0,-3.42)
  oval 1.7x1 hole 0.95: 4(0,-5.13) 5(0,-6.84)
  silkscreen extent -0.99,-7.7 1.45,0.86

## Part data
"3S INPUT" BL_MOT BR_MOT FL_MOT FR_MOT: library part JST_Leads_In
C1 C2 C3 C4 C7 C8 C9 C10 C11 C12 C13 C14 C15 C16 C17: library part Cap, LatestRevisionDate=17-Jul-2002, LatestRevisionNote="Re-released for DXP Platform.", PackageDescription="Radial Cap, Thru-Hole; 2 Leads; 0.3 in Pin Spacing", PackageReference=RAD-0.3, Published=8-Jun-2000, Publisher="Altium Limited"
C24 C29 C30 C31 C32 C37: library part "Polarised Capacitor"
D4: "2A Schottky Diode"
ESP32 STM32: "USB - micro B USB 2.0 Receptacle Connector 5 Position Surface Mount, Right Angle; Through Hole", Package=None, Availability=Unavailable, MF="Amphenol ICC", MP=10118193-0001LF, Price=None, SnapEDA_Link=https://www.snapeda.com/parts/10118193-0001LF/Amphenol%20FCI/view-part/2758989/?ref=snap
L1: library part "SMD Inductor 18x16.9", "TMPC1707"
L2: library part "22uH Inductor, 7.1*6.6"
Q1 Q2 Q3: Package="TO-18-3 NJS", Digi-Key_Part_Number=1086-15156-ND, Digi-Key_Purchase_URL=https://www.digikey.com.mx/product-detail/en/microsemi-corporation/JANS2N2222A/1086-15156-ND/4384334?utm_source=snapeda&utm_medium=aggregator&utm_campaign=symbol, MF="MICROSS/On Semiconductor", MP=2N2222, SnapEDA_Link=https://www.snapeda.com/parts/2N2222/MICROSS/On%20Semiconductor/view-part/561967/?ref=snap
R1 R2 R3 R4 R5 R6 R7 R8 R9 R10 R11 R12 R13 R14 R15 R16 R17 R18 R19 R20 R21 R22 R23 R24 R25 R26 R27 R28 R29 R29 R29 R29: library part Resistor
U1: "WiFi 802.11b/g/n/d/e/i Transceiver Module 2.4GHz Surface Mount", Package="Module Olimex LTD", Availability=Unavailable, MF="Olimex LTD", MP=ESP-WROOM-32, Price=None, SnapEDA_Link=https://www.snapeda.com/parts/ESP-WROOM-32/Olimex%20LTD/view-part/2311927/?ref=snap
U4: "17V Clamp 5A _8/20µs_ Ipp Tvs Diode Surface Mount SOT-666", Package="SOT-563 STMicroelectronics", Availability=Unavailable, MF=STMicroelectronics, MP=USBLC6-2P6, Price=None, SnapEDA_Link=https://www.snapeda.com/parts/USBLC6-2P6/STMicroelectronics/view-part/106846/?ref=snap
U5: "8A Buck COnverter"
U6: library part XL1509-5
U7: "Sot223/Pkg 1-Amp 3.3-Volt Low Drop Out Voltage Regulatator", Package=None, Availability=Unavailable, MF="Advanced Monolithic Systems", MP=AMS1117-3.3, Price=None, SnapEDA_Link=https://www.snapeda.com/parts/AMS1117-3.3/Advanced%20Monolithic%20Systems/view-part/53450/?ref=snap
U8: "Accelerometer, Gyroscope, 6 Axis Sensor I²C Output", Package="VFQFN-24 TDK InvenSense", Availability=Unavailable, MF="TDK InvenSense", MP=MPU-6050, Price=None, SnapEDA_Link=https://www.snapeda.com/parts/MPU-6050/TDK%20InvenSense/view-part/4503180/?ref=snap
U9 U10: "Level Translator"
U11: "CAN Transceiver"
USR1 USR2: library part "SPST Switch"
C5 C6 C18 C19 C20 C21 C22 C23 C25 C26 C27 C28 C33 C34 C35 C36 C38 C39 C40 C41 C42 C43 C43 C43 C43 C44 C44 C44 C44 C45 C45 C45 C45 C46 C46 C46 C46 C47 C47 C47 C47 C48 C48 C48 C48 C49 C49 C49 C49: LatestRevisionDate=17-Jul-2002, LatestRevisionNote="Re-released for DXP Platform.", PackageDescription="Radial Cap, Thru-Hole; 2 Leads; 0.3 in Pin Spacing", PackageReference=RAD-0.3, Published=8-Jun-2000, Publisher="Altium Limited"
D3: Code_JEDEC=DO-214-AB, LatestRevisionDate=17-Jul-2002, LatestRevisionNote="Re-released for DXP Platform.", PackageDescription="DO-214-AB/SMC; 2 C-Bend Leads; Body 7.9 x 5.9 mm, inc. leads (LxW)", PackageReference=SMC, PackageVersion=Sep-1996, Published=8-Jun-2000, Publisher="Altium Limited"

## Free pads (board coordinates)
  rect 2x2 hole 1.2: 1(28.421,79.197) 1(30.961,79.197) 1(94.34,94.645)
  round 2 hole 1.2: 1(94.34,92.105) 2(28.421,76.697) 2(30.961,76.697) 2(91.84,94.645) 3(28.421,74.197) 3(30.961,74.197) 3(89.34,94.645)
  round 1.9 hole 1.2: 2(91.85,92.1) 3(89.34,92.105)

## Via types
v1: diameter 0.45/0.45 (per signal layer), hole 0.5, Top Layer to Bottom Layer, tented both sides, 733 vias
v2: diameter 0.276, hole 0.2, Top Layer to Bottom Layer, tented both sides, 120 vias
v3: diameter 0.457, hole 0.3, Top Layer to Bottom Layer, tented both sides, 60 vias
v4: diameter 3.5, hole 3, Top Layer to Bottom Layer, 4 vias
v5: diameter 0.45, hole 0.2, Top Layer to Bottom Layer, tented both sides, 3 vias
v6: diameter 0.457, hole 0.305, Top Layer to Bottom Layer, tented both sides, 2 vias
v7: diameter 1.016, hole 0.711, Top Layer to Bottom Layer, tented both sides, 2 vias
v8: diameter 0.8, hole 0.4, Top Layer to Bottom Layer, tented both sides, 1 vias

## Nets (pads, with @x,y where several pads share a name; then routed paths per layer and width w, separated by ;. In a path a pad name is that pad's centre, name@x,y a point inside that pad or via, vN(x,y) a via of type N, cw(c..) or ccw(c..) an arc to the next point about the centre after c; other vN are vias at no path point)
3V3: 3V3.1 3V3.2 3V3.3 BOOT0.1 C1.2 C2.2 C7.2 C8.2 C9.2 C10.2 C11.2 C12.2 C13.2 C14.2 C15.2 C16.2 C17.2 C33.2 C34.2 C38.2 C39.2 C42.2 R2.1 R6.1 R11.1 R14.1 R15.1 R24.2 R25.2 U1.2 U3.1 U3.13 U3.17 U3.19 U3.32 U3.33 U3.64 U7.2 U8.8 U8.13 U9.3 U9.6 U10.3 U10.6 U11.3 X1.1 X1.4 | length 5
  Top Layer w0.889: 3V3.3@122.95,47.125 3V3.2@122.95,49.625 3V3.1@122.95,52.125
5V: 5V.1 5V.2 5V.3 "Video Switch.2" C31.1 C32.1 C35.2 C36.2 CN13.1 D1.K D2.K D5.A D6.A I2C.1 L2.2 LED1.4 LED2.4 LS1.A R17.2 R20.2 R21.2 U4.5 U7.3 U9.4 U10.4 U12_BL.11 U12_BR.11 U12_FL.11 U12_FR.11 | length 62.8
  Top Layer w0.2: 106.475,49.175 106.475,54.425 106.5,54.45
  Top Layer w0.25: 94,60.161 94.075,60.086
  Top Layer w0.3: 85,60.05 85.025,60.075
  Top Layer w0.889: L2.2@105.15,49.75 L2.2@105.275,49.625 ; 113.15,54.45 115.485,52.115 U7.3@116.37,52.115
  Top Layer w1: 90.578,60.086 94.075,60.086 95.622,60.086
  Top Layer w1.2: 90.35,60.075 90.567,60.075 90.578,60.086 ; 95.622,60.086 95.633,60.075 97.925,60.075 98.175,60.075
  Top Layer w1.397: 98.175,60.075 107.75,60.075 108.975,58.85 C32.1@110.875,56.95 ; L2.2@105.15,49.75 R17.2@105.15,54.45 106.5,54.45 113.15,54.45 117.275,54.45
  Top Layer w1.4: LS1.A@79.2,63 79.2,60.275 79,60.075 85.025,60.075 90.35,60.075
8V4: 8V4.1 8V4.2 8V4.3 C28.2 C29.1 C30.1 L1.2 pad.2@28.421,76.697 pad.2@30.961,76.697 R18.2 | length 3.1
  Top Layer w0.203: C29.1@34.875,56.468 35.893,55.45 v5(36.575,55.45)
  Top Layer w1.54: C30.1@34.543,61.957 C30.1@34.85,61.957
  Top Layer w2.286: C29.1@34.85,56.493 C29.1@34.875,56.468
  Bottom Layer w0.203: v5(36.575,55.45) 37.2,55.45 R18.2@37.225,55.425